# EAGLE board CT_schematic (EAGLE 7.6.0)

Size 100 x 80 mm. Coordinates in mm from the lower left corner, seen from the top.
Outline: 0,0 100,0 100,80 0,80 0,0
Copper layers (1*16): Top 0.035mm / dielectric 1.5mm / Bottom 0.035mm
Design rules "default": minimum track width 10mil, minimum drill 24mil, track to track 8mil, track to pad 8mil, pad to pad 8mil, via to via 8mil, smd to smd 8mil, copper to edge 40mil, drill to drill 8mil, minimum pad ring 10mil, minimum via ring 8mil, stop-mask expansion 4mil, vias tented up to drill 0mil, thermal gap 10mil

## Footprints (pad centres in the part's own frame; a part is rotated, then mirrored left to right if it is on the bottom)
C0603 = smd 0.8 x 0.8: 1 -0.762,0; 2 0.762,0
C0402 = smd 0.5 x 0.5: 1 -0.508,0; 2 0.508,0
C0805 = smd 1.2 x 1.3: 1 -1.016,0; 2 1.016,0
C1206 = smd 1.3 x 1.6: 1 -1.524,0; 2 1.524,0
C1210 = smd 1.2 x 2.5: 1 -1.524,0; 2 1.524,0
EXV-9H = smd 3.505 x 1.676: 1 -2.857,0; 2 2.857,0
L0603 = smd 0.8 x 0.8: 1 -0.762,0; 2 0.762,0
PJ-037B_PACKAGE = drill 3.7 square: 1 12,0 | drill 3.2 square: 2 6,0
R0603 = smd 0.8 x 0.8: 1 -0.762,0; 2 0.762,0
UFBGA100 = smd 0.28 x 0.28: A1 -2.75,2.75; A2 -2.25,2.75; A3 -1.75,2.75; A4 -1.25,2.75; A5 -0.75,2.75; A6 -0.25,2.75; A7 0.25,2.75; A8 0.75,2.75; A9 1.25,2.75; A10 1.75,2.75; A11 2.25,2.75; A12 2.75,2.75; B1 -2.75,2.25; B2 -2.25,2.25; B3 -1.75,2.25; B4 -1.25,2.25; B5 -0.75,2.25; B6 -0.25,2.25; B7 0.25,2.25; B8 0.75,2.25; B9 1.25,2.25; B10 1.75,2.25; B11 2.25,2.25; B12 2.75,2.25; C1 -2.75,1.75; C2 -2.25,1.75; C3 -1.75,1.75; C4 -1.25,1.75; C5 -0.75,1.75; C8 0.75,1.75; C9 1.25,1.75; C10 1.75,1.75; C11 2.25,1.75; C12 2.75,1.75; D1 -2.75,1.25; D2 -2.25,1.25; D3 -1.75,1.25; D10 1.75,1.25; D11 2.25,1.25; D12 2.75,1.25; E1 -2.75,0.75; E2 -2.25,0.75; E3 -1.75,0.75; E10 1.75,0.75; E11 2.25,0.75; E12 2.75,0.75; F1 -2.75,0.25; F2 -2.25,0.25; F11 2.25,0.25; F12 2.75,0.25; G1 -2.75,-0.25; G2 -2.25,-0.25; G11 2.25,-0.25; G12 2.75,-0.25; H1 -2.75,-0.75; H2 -2.25,-0.75; H3 -1.75,-0.75; H10 1.75,-0.75; H11 2.25,-0.75; H12 2.75,-0.75; J1 -2.75,-1.25; J2 -2.25,-1.25; J3 -1.75,-1.25; J10 1.75,-1.25; J11 2.25,-1.25; J12 2.75,-1.25; K1 -2.75,-1.75; K2 -2.25,-1.75; K3 -1.75,-1.75; K4 -1.25,-1.75; K5 -0.75,-1.75; K8 0.75,-1.75; K9 1.25,-1.75; K10 1.75,-1.75; K11 2.25,-1.75; K12 2.75,-1.75; L1 -2.75,-2.25; L2 -2.25,-2.25; L3 -1.75,-2.25; L4 -1.25,-2.25; L5 -0.75,-2.25; L6 -0.25,-2.25; L7 0.25,-2.25; L8 0.75,-2.25; L9 1.25,-2.25; L10 1.75,-2.25; L11 2.25,-2.25; L12 2.75,-2.25; M1 -2.75,-2.75; M2 -2.25,-2.75; M3 -1.75,-2.75; M4 -1.25,-2.75; M5 -0.75,-2.75; M6 -0.25,-2.75; M7 0.25,-2.75; M8 0.75,-2.75; M9 1.25,-2.75; M10 1.75,-2.75; M11 2.25,-2.75; M12 2.75,-2.75
SAMTEC_FTSH-105-01-L-DV-K = smd 0.762 x 2.794: 1 -2.54,-2.032; 2 -2.54,2.032; 3 -1.27,-2.032; 4 -1.27,2.032; 5 0,-2.032; 6 0,2.032; 7 1.27,-2.032; 8 1.27,2.032; 9 2.54,-2.032; 10 2.54,2.032
SOIC-8 = smd 1.6 x 0.6: 1 -2.7,1.905 | smd 1.55 x 0.6: 2 -2.7,0.635; 3 -2.7,-0.635; 4 -2.7,-1.905; 5 2.7,-1.905; 6 2.7,-0.635; 7 2.7,0.635; 8 2.7,1.905
182-009-MALE = drill 1.194 pad 1.524 octagon: 1 -5.537,10.923; 2 -2.769,10.923; 3 0,10.923; 4 2.769,10.923; 5 5.537,10.923; 6 -4.153,8.08; 7 -1.384,8.08; 8 1.384,8.08; 9 4.153,8.08 | hole 3.048: -12.446,9.501; 12.446,9.501
TH58NVG3S0HBAI4 = smd 0.46 x 0.46: A1 -5.6,2.4; A2 -5.6,1.6; A9 -5.6,-5.6; A10 -5.6,-6.4; B1 -4.8,2.4; B9 -4.8,-5.6; B10 -4.8,-6.4; C3 -4,0.8; C4 -3.2,0.8; C5 -2.4,0.8; C6 -1.6,0.8; C7 -0.8,0.8; C8 0,0.8; D3 -4,0; D4 -3.2,0; D5 -2.4,0; D6 -1.6,0; D7 -0.8,0; D8 0,0; E3 -4,-0.8; E4 -3.2,-0.8; E5 -2.4,-0.8; E6 -1.6,-0.8; E7 -0.8,-0.8; E8 0,-0.8; F3 -4,-1.6; F4 -3.2,-1.6; F5 -2.4,-1.6; F6 -1.6,-1.6; F7 -0.8,-1.6; F8 0,-1.6; G3 -4,-2.4; G4 -3.2,-2.4; G5 -2.4,-2.4; G6 -1.6,-2.4; G7 -0.8,-2.4; G8 0,-2.4; H3 -4,-3.2; H4 -3.2,-3.2; H5 -2.4,-3.2; H6 -1.6,-3.2; H7 -0.8,-3.2; H8 0,-3.2; J3 -4,-4; J4 -3.2,-4; J5 -2.4,-4; J6 -1.6,-4; J7 -0.8,-4; J8 0,-4; K3 -4,-4.8; K4 -3.2,-4.8; K5 -2.4,-4.8; K6 -1.6,-4.8; K7 -0.8,-4.8; K8 0,-4.8; L1 0.8,2.4; L2 0.8,1.6; L9 0.8,-5.6; L10 0.8,-6.4; M1 1.6,2.4; M2 1.6,1.6; M9 1.6,-5.6; M10 1.6,-6.4
ABS07-32.768KHZ-7-T = smd 1.1 x 2.4: 1 -2.5,0; 2 0,0
ABLS-25.000MHZ-B2F-T = smd 5.6 x 2.8: 1 -3.81,0; 2 5.69,0
WSON-8 = smd 0.3 x 0.6: 1 -0.75,0; 2 0.05,0; 3 0.85,0; 4 1.65,0; 5 1.65,3.8; 6 0.85,3.8; 7 0.05,3.8; 8 -0.75,3.8 | smd 3 x 2.6: PAD 0.45,1.9
SON-6 = smd 0.55 x 0.3: 1 -0.355,0.5 | smd 0.52 x 0.3: 2 -0.37,0; 3 -0.37,-0.5; 4 0.37,-0.5; 5 0.37,0; 6 0.37,0.5
SW_4-1437565-2 = smd 1.4 x 2.1: 1 -2.23,4.55; 2 -2.23,-4.55; 3 2.23,4.55; 4 2.23,-4.55
LGM67K-G1J2-24-Z = smd 0.8 x 1.4: A -2,0; C 0,0
NC7SZ125M5X = smd 1.3 x 0.7: 1 -1.3,0.95; 2 -1.3,0; 3 -1.3,-0.95; 4 1.3,-0.95; 5 1.3,0.95

## Placement (x,y rotation side)
C1  1e-06  [C0603]  -33.02,73.66 0 top  (outside the outline)
C2  1e-07  [C0603]  -36.83,73.66 0 top  (outside the outline)
C3  1e-07  [C0603]  -40.64,73.66 0 top  (outside the outline)
C4  1e-07  [C0603]  -44.45,73.66 0 top  (outside the outline)
C5  1e-07  [C0603]  -48.26,73.66 0 top  (outside the outline)
C6  1e-07  [C0603]  -52.07,73.66 0 top  (outside the outline)
C7  1e-07  [C0603]  -55.88,73.66 0 top  (outside the outline)
C8  4.7e-06  [C0603]  -29.21,73.66 0 top  (outside the outline)
C9  1e-08  [C0603]  -59.69,73.66 0 top  (outside the outline)
C10  1e-06  [C0603]  -63.5,73.66 0 top  (outside the outline)
C11  1e-11  [C0402]  -34.29,78.74 0 top  (outside the outline)
C12  1e-11  [C0402]  -38.1,78.74 0 top  (outside the outline)
C13  1e-11  [C0402]  -41.91,78.74 0 top  (outside the outline)
C14  1e-11  [C0402]  -45.72,78.74 0 top  (outside the outline)
C15  1e-07  [C0402]  -49.53,78.74 0 top  (outside the outline)
C16  1e-07  [C0402]  -53.34,78.74 0 top  (outside the outline)
C17  1e-05  [C0805]  -72.39,60.96 0 top  (outside the outline)
C18  1e-07  [C0402]  -57.15,78.74 0 top  (outside the outline)
C19  1e-07  [C0402]  -60.96,78.74 0 top  (outside the outline)
C20  1e-08  [C0402]  -64.77,78.74 0 top  (outside the outline)
C21  1e-05  [C1206]  -54.61,60.96 0 top  (outside the outline)
C22  1e-05  [C1210]  -48.26,62.23 0 top  (outside the outline)
C23  1e-07  [C0402]  -68.58,78.74 0 top  (outside the outline)
C24  0.0001  [EXV-9H]  -38.1,53.34 0 top  (outside the outline)
C25  0.0001  [EXV-9H]  -49.53,53.34 0 top  (outside the outline)
C26  1e-08  [C0402]  -72.39,78.74 0 top  (outside the outline)
C27  1e-08  [C0402]  -15.24,83.82 0 top  (outside the outline)
F1  240.0  [L0603]  -67.31,73.66 0 top  (outside the outline)
J1  PJ-037B  [PJ-037B_PACKAGE]  -74.93,29.21 0 top  (outside the outline)
R2  1000.0  [R0603]  -71.12,73.66 0 top  (outside the outline)
R4  4700.0  [R0603]  -74.93,73.66 0 top  (outside the outline)
R5  10000.0  [R0603]  -35.56,68.58 0 top  (outside the outline)
R6  10000.0  [R0603]  -40.64,68.58 0 top  (outside the outline)
R7  10000.0  [R0603]  -45.72,68.58 0 top  (outside the outline)
R8  10000.0  [R0603]  -50.8,68.58 0 top  (outside the outline)
R9  5.0  [R0603]  -15.24,78.74 0 top  (outside the outline)
R10  120.0  [R0603]  -19.05,78.74 0 top  (outside the outline)
R11  100000.0  [R0603]  -15.24,68.58 0 top  (outside the outline)
R12  10000.0  [R0603]  -55.88,68.58 0 top  (outside the outline)
R13  10000.0  [R0603]  -60.96,68.58 0 top  (outside the outline)
R14  10000.0  [R0603]  -66.04,68.58 0 top  (outside the outline)
R15  10000.0  [R0603]  -71.12,68.58 0 top  (outside the outline)
R16  10000.0  [R0603]  -15.24,73.66 0 top  (outside the outline)
R17  100000.0  [R0603]  -20.32,68.58 0 top  (outside the outline)
R18  2231.0  [R0603]  -22.86,78.74 0 top  (outside the outline)
R19  1000.0  [R0603]  -26.67,78.74 0 top  (outside the outline)
R20  10000.0  [R0603]  -20.32,73.66 0 top  (outside the outline)
R21  10000.0  [R0603]  -25.4,73.66 0 top  (outside the outline)
R22  9100.0  [R0603]  -30.48,78.74 0 top  (outside the outline)
R23  680000.0  [R0603]  -25.4,68.58 0 top  (outside the outline)
R24  120000.0  [R0603]  -30.48,68.58 0 top  (outside the outline)
U1  STM32F302VDH6  [UFBGA100]  -44.45,43.18 0 top  (outside the outline)
U2  FTSH-105-01-L-DV-K  [SAMTEC_FTSH-105-01-L-DV-K]  -35.56,30.48 0 top  (outside the outline)
U3  SN65HVD230D  [SOIC-8]  -57.15,41.91 0 top  (outside the outline)
U4  182-009-113R531  [182-009-MALE]  -36.83,6.35 0 top  (outside the outline)
U5  TH58NVG3S0HBAI4  [TH58NVG3S0HBAI4]  -53.34,31.75 0 top  (outside the outline)
U6  ABS07-32.768KHZ-7-T  [ABS07-32.768KHZ-7-T]  -27.94,62.23 0 top  (outside the outline)
U7  ABLS-25.000MHZ-B2F-T  [ABLS-25.000MHZ-B2F-T]  -68.58,53.34 0 top  (outside the outline)
U8  LP3878SDX-ADJ/NOPB  [WSON-8]  -30.48,52.07 0 top  (outside the outline)
U9  TPS3895ADRYR  [SON-6]  -17.78,82.55 0 top  (outside the outline)
U10  4-1437565-2  [SW_4-1437565-2]  -27.94,43.18 0 top  (outside the outline)
U11  Q65110A2395  [LGM67K-G1J2-24-Z]  -36.83,62.23 0 top  (outside the outline)
U12  nc7sz125m5x  [NC7SZ125M5X]  -59.69,60.96 0 top  (outside the outline)
U13  nc7sz125m5x  [NC7SZ125M5X]  -66.04,60.96 0 top  (outside the outline)

## Library data of the parts
C1-C27 F1 J1 R2 R4-R24 U1-U13 = circuit_tree

## Nets
CLK_CRYSTAL_U1_D1: C11.1 U1.D1 U6.1
CLK_CRYSTAL_U1_E1: C12.1 U1.E1 U6.2
CLK_CRYSTAL_U1_F1: C13.1 U1.F1 U7.1
CLK_CRYSTAL_U1_G1: C14.1 U1.G1 U7.2
GND: C1.2 C2.2 C3.2 C4.2 C5.2 C6.2 C7.2 C8.2 C9.2 C10.2 C11.2 C12.2 C13.2 C14.2 C15.2 C16.2 C17.2 C18.2 C19.2 C20.2 C21.2 C22.2 C23.2 C24.2 C25.2 C26.2 C27.2 J1.2 R2.2 R5.2 R9.2 R11.2 R19.2 R22.2 R24.2 U1.D3 U1.E3 U1.F11 U1.F12 U1.K1 U2.3 U2.5 U3.2 U4.5 U5.C5 U5.K3 U5.K8 U8.3 U8.PAD U9.2 U11.C U12.2 U12.3 U13.1 U13.3
NET_U1_A4: R5.1 U1.A4
NET_U1_H2: R4.1 U1.H2 U13.4
NET_U1_L1: C9.1 C10.1 F1.1 U1.L1 U1.M1
NET_U1_M11: U11.A
NET_U1_M12: U10.3 U10.4
NET_U2_9: R9.1 U2.9
NET_U3_6: R10.2 U3.6
NET_U3_8: R11.1 U3.8
NET_U4_2: R10.2 U3.6 U4.2
NET_U4_3: R10.1 U3.7 U4.3
NET_U5_C3: R15.1 U5.C3
NET_U5_C8: R16.1 U5.C8
NET_U8_1: C20.1 U8.1
NET_U8_6: R18.2 R19.1 U8.6
NET_U8_8: R17.1 U8.8
NET_U9_1: R21.1 R22.1 U9.1
NET_U9_3: R23.2 R24.1 U9.3
NET_U9_4: R20.1 U9.4 U12.4 U13.2
NET_U10_1: R2.1 U10.1 U10.2
PROC_CAN_RX: U1.A3 U3.4
PROC_CAN_TX: U1.A12 U3.1
PROC_FMC_D0: U1.H11 U5.H4
PROC_FMC_D1: U1.H10 U5.J4
PROC_FMC_D2: U1.C9 U5.K4
PROC_FMC_D3: U1.B9 U5.K5
PROC_FMC_D4: U1.M7 U5.K6
PROC_FMC_D5: U1.L7 U5.J7
PROC_FMC_D6: U1.M8 U5.K7
PROC_FMC_D7: U1.L8 U5.J8
PROC_FMC_NCE2: R12.1 U1.A5 U5.C6
PROC_FMC_NOE: R13.1 U1.B7 U5.D4
PROC_FMC_NWE: R14.1 U1.A6 U5.C7
PROC_SYS_JTCK_SWCLK: R7.1 U1.A10 U2.4
PROC_SYS_JTDO_TRACESWO: U1.A8 U2.6
PROC_SYS_JTMS_SWDIO: R8.1 U1.A11 U2.2
RST_OUT_U2_JTAG_RST_B: R6.1 U2.10 U12.1
VCC_S1_10V1: C21.1 C24.1 C25.1 J1.1 R17.2 U8.4
VCC_TIER1_3V3: C1.1 C2.1 C3.1 C4.1 C5.1 C6.1 C7.1 C8.1 C15.1 C16.1 C17.1 C18.1 C19.1 C22.1 C23.1 C26.1 C27.1 F1.2 R4.2 R6.2 R7.2 R8.2 R12.2 R13.2 R14.2 R15.2 R16.2 R18.1 R20.2 R21.2 R23.1 U1.C4 U1.E2 U1.G11 U1.G12 U1.H3 U2.1 U3.3 U5.H8 U5.J6 U8.5 U9.6 U12.5 U13.5

## Tracks (layer width: path | path; a pad name or v marks a point on that pad's centre or on a via)
CLK_CRYSTAL_U1_D1  (2 unrouted)
CLK_CRYSTAL_U1_E1  (2 unrouted)
CLK_CRYSTAL_U1_F1  (2 unrouted)
CLK_CRYSTAL_U1_G1  (2 unrouted)
GND  (54 unrouted)
NET_U1_A4  (1 unrouted)
NET_U1_H2  (2 unrouted)
NET_U1_L1  (4 unrouted)
NET_U1_M12  (1 unrouted)
NET_U2_9  (1 unrouted)
NET_U3_6  (1 unrouted)
NET_U3_8  (1 unrouted)
NET_U4_2  (2 unrouted)
NET_U4_3  (2 unrouted)
NET_U5_C3  (1 unrouted)
NET_U5_C8  (1 unrouted)
NET_U8_1  (1 unrouted)
NET_U8_6  (2 unrouted)
NET_U8_8  (1 unrouted)
NET_U9_1  (2 unrouted)
NET_U9_3  (2 unrouted)
NET_U9_4  (3 unrouted)
NET_U10_1  (2 unrouted)
PROC_CAN_RX  (1 unrouted)
PROC_CAN_TX  (1 unrouted)
PROC_FMC_D0  (1 unrouted)
PROC_FMC_D1  (1 unrouted)
PROC_FMC_D2  (1 unrouted)
PROC_FMC_D3  (1 unrouted)
PROC_FMC_D4  (1 unrouted)
PROC_FMC_D5  (1 unrouted)
PROC_FMC_D6  (1 unrouted)
PROC_FMC_D7  (1 unrouted)
PROC_FMC_NCE2  (2 unrouted)
PROC_FMC_NOE  (2 unrouted)
PROC_FMC_NWE  (2 unrouted)
PROC_SYS_JTCK_SWCLK  (2 unrouted)
PROC_SYS_JTDO_TRACESWO  (1 unrouted)
PROC_SYS_JTMS_SWDIO  (2 unrouted)
RST_OUT_U2_JTAG_RST_B  (2 unrouted)
VCC_S1_10V1  (5 unrouted)
VCC_TIER1_3V3  (43 unrouted)